# Altium PCB LimeSDR-Micro_mPCIe_1v4.PcbDoc (part 2 of 11)
Units mm, origin at the board's own origin, x right, y up, seen from the top; angles counter-clockwise.
Board outline 50.8 x 29.7 mm, 8 copper layers (Top, L2, L3, L4, L5, L6, L7, Bottom), stack 0.925 mm thick; 664 components, 386 nets, 2358 pads, 843 vias.
Unrouted connection lines stored in the file: 28.
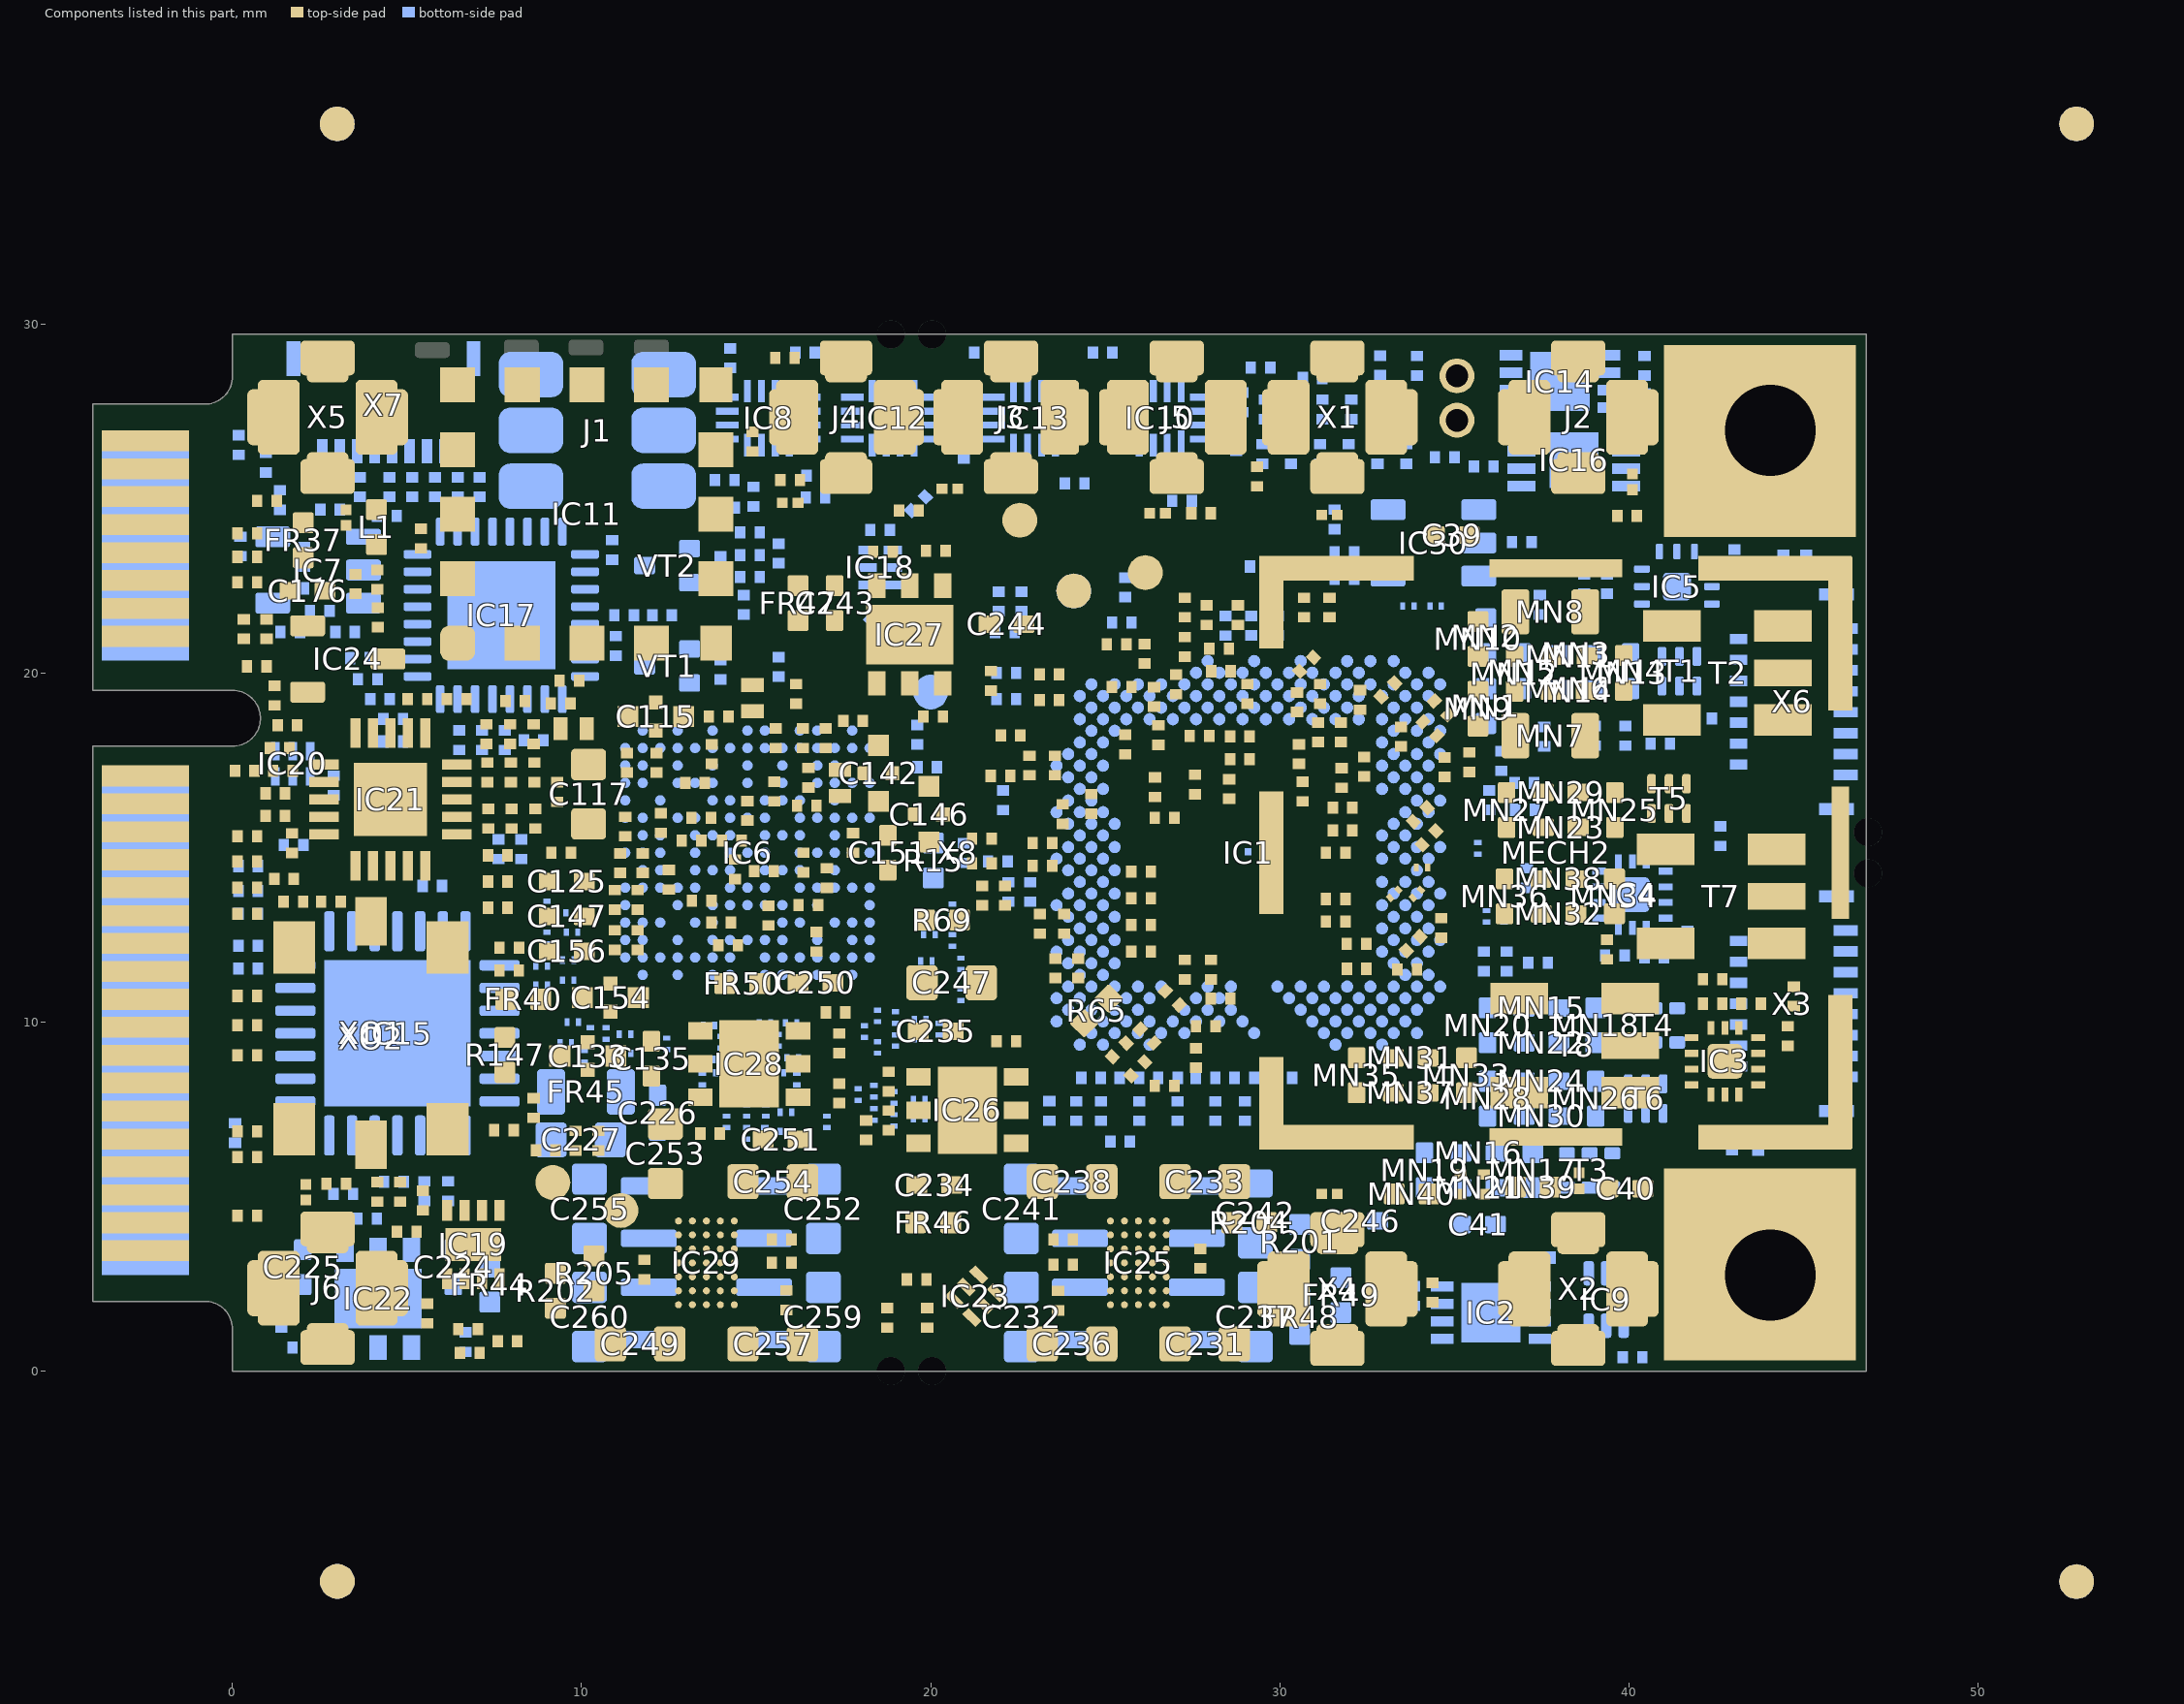
[diagram p8: the components of this part, seen from the top]

## Components (designator, comment, footprint, x,y, rotation, side; value= is the part's Value field where it differs from the comment) (continued)
R185 "3k3, 1%" RES0201 13.974,23.068 r270 bottom
R186 "3k3, 1%" RES0201 11.22,21.65 r180 bottom
R187 "0R" RES0201 3.175,5.075 r180 bottom
R188 "10k, 1%" RES0201 0.075,6.82 r270 bottom
R189 "5.6k, 1%" RES0201 2.624,4.367 r0 bottom
R190 "330R, 1%" RES0201 0.325,21.257 r90 top
R191 "0R" RES0201 0.695,20.187 r0 top
R192 "10k, 1%" RES0201 3.857,4.367 r0 bottom
R193 "0R" RES0201 1.2,19.35 r270 top
R194 "0R" RES0201 18.15,6.9 r90 top
R195 "7.5k, 1%" RES0201 18.8,8.295 r270 top
R196 "10k, 1%" RES0201 18.8,7.185 r270 top
R197 "3k3, 1%" RES0201 23.795,3.775 r0 top
R198 "47k, 1%" RES0201 23.65,2.02 r90 top
R199 "100k, 1%" RES0201 23.795,3.05 r0 top
R200 "0R" RES0201 19.375,24.65 r0 top
R201 "0R" RES0402#2 30.575,3.7 r270 bottom
R202 "0R" RES0402#1 9.25,2.3 r90 top
R203 "0R" RES0201 29.425,23.05 r0 bottom
R204 "0R" RES0402#1 29.125,4.25 r0 top
R205 "0R" RES0402#1 10.35,2.8 r90 top
R206 "0R" RES0201 30.6,23.05 r180 bottom
R207 "12.7k, 1%" RES0201 20.145,23.5 r180 top
R208 "0R" RES0201 1.4,1.525 r270 bottom
R209 "10k, 1%" RES0201 18.635,23.475 r180 top
R210 "0R" RES0201 17.275,10.275 r0 top
R211 "31.6k, 1%" RES0201 17.375,7.955 r90 top
R212 "10k, 1%" RES0201 17.375,9.39 r90 top
R213 "3k3, 1%" RES0201 15.73,3.775 r180 top
R214 "100k, 1%" RES0201 15.73,3.1 r180 top
R215 "3k3, 1%" RES0201 15.863,2.032 r90 top
R216 "3k3, 1%" RES0201 31.85,23.45 r0 bottom
R217 "4.7k, 1%" RES0201 31.85,22.7 r180 bottom
R229 "0R" RES0201 39.95,24.5 r180 top
R230 "0R" RES0201 28.45,21.35 r90 bottom
R231 "0R" RES0201 29.18,21.356 r90 bottom
R232 "0R" RES0201 29.95,21.356 r90 bottom
T1 "3600BL14M050" 3600BL14M050_balun_0603 41.451,20.05 r0 bottom
T2 "TC1-1-13M-45+" TC1-1-13MA+_JA4220-AL_ 42.825,20 r270 top
T3 "B0322J5050AHF" Anaren_0805_balun_B0322J5050AHF 38.875,5.75 r0 bottom
T4 "B0322J5050AHF" Anaren_0805_balun_B0322J5050AHF 40.735,9.905 r0 bottom
T5 "3600BL14M050" 3600BL14M050_balun_0603 41.15,16.4 r0 top
T6 "3600BL14M050" 3600BL14M050_balun_0603 40.483,7.805 r0 bottom
T7 "TC1-1-13M-45+" TC1-1-13MA+_JA4220-AL_ 42.638,13.6 r270 top
T8 "TC1-1-13M-45+" TC1-1-13MA+_JA4220-AL_ 38.45,9.325 r270 top
TP1 "TESTPOINT_PAD" TP_PAD_1MM#1 20,19.45 r180 bottom
TP2 "TESTPOINT_PAD" TP_PAD_1MM#2 26.15,22.875 r90 top
TP3 "TESTPOINT_PAD" TP_PAD_1MM#2 22.55,24.375 r90 top
TP7 "TESTPOINT_PAD" TP_PAD_1MM#2 11.125,4.6 r90 top
TP8 "TESTPOINT_PAD" TP_PAD_1MM#2 9.175,5.4 r90 top
VT1 "DMG1012T" SOT523 12.45,20.2 r180 bottom
VT2 "DMG1012T" SOT523 12.45,23.075 r180 bottom
X1 "U.FL/MMCX" MMCX_UFL_conn_u_v2#5 31.65,27.325 r180 top locked
X2 "U.FL/MMCX" MMCX_UFL_conn_u_v2#1 38.55,2.35 r0 top locked
X3 "5025981593" 5025981593_FPC_CONNECTOR 44.675,10.525 r270 bottom locked
X4 "U.FL/MMCX" MMCX_UFL_conn_u_v2#1 31.65,2.35 r0 top locked
X5 "U.FL/MMCX" MMCX_UFL_conn_u_v2#1 2.725,27.325 r180 top
X6 "5025981593" 5025981593_FPC_connector 44.675,19.175 r270 bottom locked
X7 "8-pin FPC connector" 503480-0800_8PIN_FPC_CONN 4.325,27.675 r0 bottom locked
X8 "mPCI Express Card Edge connector" PCIe_MiniCard -4,18.7 r270 top locked
XO1 "E6245LF 30.72 MHz" RAKON_RPT7050A 3.964,9.685 r90 top locked
XO2 "E5280LF 30.72MHz" RAKON_TXCO 3.964,9.685 r90 top locked

## Footprints (in the part's own frame and the unit in brackets; to place one, negate y for a bottom-side part, rotate by r counter-clockwise, add the part's x,y. Pads: shape width x height; smd on the part's side, far side on the other; paste and mask are expansions set on the pad)
74LVC1G3157FZ4_SPDT_SW_DFN1410-6 [mm]
  rect 0.525x0.25 smd mask+0.05: 1(-0.363,0.5) 2(-0.363,0) 3(-0.363,-0.5) 4(0.363,-0.5) 5(0.363,0) 6(0.363,0.5)
  silkscreen extent -0.82,-0.8 0.5,0.9, body extent -0.51,-0.7 0.51,0.7, height 0.4
3600BL14M050_balun_0603 [mm]
  rrect50% 0.25x0.55 smd mask+0.04: 1(0.5,0.425) 2(0,0.425) 3(-0.5,0.425) 4(-0.5,-0.425) 5(0,-0.425) 6(0.5,-0.425)
  silkscreen extent -0.92,-0.53 0.92,0.53, body extent -0.8,-0.41 0.8,0.41, height 0.6
503480-0800_8PIN_FPC_CONN [mm]
  rect 0.3x0.7 smd mask+0.05: 1(-1.75,1.325) 2(-1.25,1.325) 3(-0.75,1.325) 4(-0.25,1.325) 5(0.25,1.325) 6(0.75,1.325) 7(1.25,1.325) 8(1.75,1.325)
  rect 0.4x1 smd mask+0.05: MECH(-2.58,-1.325) MECH(2.58,-1.325)
  silkscreen extent -3,-1.8 3,2.03, body extent -2.85,-1.93 2.85,1.67, height 1.88
5025981593_FPC_CONNECTOR [mm]
  rect 0.3x0.7 smd mask+0.05: 1(-2.1,-1.532) 3(-1.5,-1.532) 5(-0.9,-1.532) 7(-0.3,-1.532) 9(0.3,-1.532) 11(0.9,-1.532) 13(1.5,-1.532) 15(2.1,-1.532)
  rect 0.3x0.5 smd mask+0.05: 2(-1.8,1.533) 4(-1.2,1.533) 6(-0.6,1.533) 8(0,1.533) 10(0.6,1.533) 12(1.2,1.533) 14(1.8,1.533)
  rect 0.35x1 smd mask+0.05: MP1(-3.075,-1.267) MP2(3.075,-1.267)
  silkscreen extent -3.3,-1.9 3.3,1.78, body extent -3.3,-1.77 3.3,2.03, height 1.16
5025981593_FPC_connector [mm]
  rect 0.3x0.7 smd mask+0.05: 1(-2.1,-1.532) 3(-1.5,-1.532) 5(-0.9,-1.532) 7(-0.3,-1.532) 9(0.3,-1.532) 11(0.9,-1.532) 13(1.5,-1.532) 15(2.1,-1.532)
  rect 0.3x0.5 smd mask+0.05: 2(-1.8,1.533) 4(-1.2,1.533) 6(-0.6,1.533) 8(0,1.533) 10(0.6,1.533) 12(1.2,1.533) 14(1.8,1.533)
  rect 0.35x1 smd mask+0.05: MP1(-3.075,-1.267) MP2(3.075,-1.267)
  silkscreen extent -3.3,-1.9 3.3,1.78, body extent -3.3,-1.77 3.3,2.03, height 1.16
AD5693RACPZ-1RL7_DAC_8LFCSP [mm]
  rect 0.6x0.3 smd mask+0.05: 1(-0.975,0.75) 2(-0.975,0.25) 3(-0.975,-0.25) 4(-0.975,-0.75) 5(0.975,-0.75) 6(0.975,-0.25) 7(0.975,0.25) 8(0.975,0.75)
  rect 0.95x1.6 smd mask+0.05: PAD(0,0)
  silkscreen extent -1.5,-1.1 1.5,1.54, body extent -1.02,-1 1.01,1, height 0.55
ADF4002 [mm]
  rect 0.85x0.3 smd mask+0.05: 1(-1.9,1) 2(-1.9,0.5) 3(-1.9,0) 4(-1.9,-0.5) 5(-1.9,-1) 11(1.9,-1) 12(1.9,-0.5) 13(1.9,0) 14(1.9,0.5) 15(1.9,1)
  rect 0.3x0.85 smd mask+0.05: 6(-1,-1.9) 7(-0.5,-1.9) 8(0,-1.9) 9(0.5,-1.9) 10(1,-1.9) 16(1,1.9) 17(0.5,1.9) 18(0,1.9) 19(-0.5,1.9) 20(-1,1.9)
  rect 2.1x2.1 smd mask+0.05: 21(0,0)
  silkscreen extent -2.3,-2.22 2.3,2.22, body extent -2.02,-2.02 2.02,2.02, height 0.8
Anaren_0805_balun_B0322J5050AHF [mm] "B0430J50100AHF anaren smd 0.4 GHz - 3 GHz balun"
  rrect30% 0.45x0.35 smd mask+0.05: 1(0.65,0.49) 2(0,0.49) 3(-0.65,0.49) 4(-0.65,-0.49) 5(0,-0.49) 6(0.65,-0.49)
  ASM BOT keep-out circle w0.1: c0.65,0.45 r0.035
  silkscreen extent -1.1,-0.4 1.1,0.8, body extent -1.02,-0.65 1.03,0.65, height 0.71
AP7330-W5-7_SOT25 [mm]
  round 0.5 on Mech14: 0(0,0)
  rrect25% 1x0.6 smd: 1(-1.3,0.95) 2(-1.3,0) 3(-1.3,-0.95) 4(1.3,-0.95) 5(1.3,0.95)
  silkscreen extent -1.27,-1.35 0.51,1.7, body extent -1.4,-1.45 1.4,1.45, height 1.19
ATECC508A_UDFN8_v2 [mm]
  rect 0.8x0.3 smd mask+0.05: 1(-1.5,0.75) 2(-1.5,0.25) 3(-1.5,-0.25) 4(-1.5,-0.75) 5(1.5,-0.75) 6(1.5,-0.25) 7(1.5,0.25) 8(1.5,0.75)
  rect 1.4x1.6 smd mask+0.05: PAD(0,0)
  silkscreen extent -1.64,-1.1 1.2,1.24, body extent -1.5,-1 1.5,1, height 0.53
BMI-S-202-C_RF_SHIELD_COVER [mm]
  body extent -8.48,-8.48 8.48,8.48, height 4.03
BMI-S-202-F_RF_SHIELD_FRAME_v3 [mm]
  rect 0.7x2.65 smd mask+0.05: 1(-8.15,-7.175) 1(-8.15,7.175)
  rect 0.7x3.5 smd mask+0.05: 1(-8.15,0)
  rect 4.4x0.7 smd mask+0.05: 1(-6.275,-8.15) 1(-6.275,8.15) 1(6.275,-8.15) 1(6.275,8.15)
  rect 3.8x0.5 smd mask+0.05: 1(0,-8.15) 1(0,8.15)
  rect 0.7x4.4 smd mask+0.05: 1(8.15,-6.275) 1(8.15,6.275)
  rect 0.5x3.8 smd mask+0.05: 1(8.15,0)
  body extent -8.25,-8.25 8.25,8.25, height 3.6
CAP0201 [mm]
  rect 0.3x0.35 smd mask+0.05: 1(-0.28,0) 2(0.28,0)
  silkscreen extent -0.2,-0.33 0.2,0.32, body extent -0.3,-0.15 0.3,0.15, height 0.25
CAP0402#1 [mm] "Chip Capacitor, Body 1.0x0.5mm, 0402, IPC Medium Density"
  round 0.2 on Mech15: 0(0,0)
  rrect20% 0.6x0.5 smd: 1(-0.5,0) 2(0.5,0)
  Top pour cut-out: -0.2,0.35 0.2,0.35 0.2,-0.35 -0.2,-0.35
  silkscreen extent -1.05,-0.5 1.05,0.5, body extent -0.52,-0.27 0.53,0.28, height 0.55
CAP0402#2 [mm] "Chip Capacitor, Body 1.0x0.5mm, 0402, IPC Medium Density"
  round 0.2 on Mech14: 0(0,0)
  rrect20% 0.6x0.5 smd: 1(-0.5,0) 2(0.5,0)
  Top pour cut-out: -0.2,0.35 0.2,0.35 0.2,-0.35 -0.2,-0.35
  silkscreen extent -1.05,-0.5 1.05,0.5, body extent -0.52,-0.27 0.53,0.28, height 0.55
CAP0603#1 [mm] "Chip Capacitor, Body 1.6x0.8mm, 0603, IPC Medium Density"
  round 0.254 on Mech15: 0(0,0)
  rrect25% 0.9x1 smd: 1(-0.85,0) 2(0.85,0)
  Top pour cut-out: -0.4,0.6 0.4,0.6 0.4,-0.6 -0.4,-0.6
  silkscreen extent -0.18,-0.48 0.18,0.48, body extent -0.85,-0.45 0.85,0.45, height 0.89
CAP0603#2 [mm] "Chip Capacitor, Body 1.6x0.8mm, 0603, IPC Medium Density"
  round 0.254 on Mech14: 0(0,0)
  rrect25% 0.9x1 smd: 1(-0.85,0) 2(0.85,0)
  Top pour cut-out: -0.4,0.6 0.4,0.6 0.4,-0.6 -0.4,-0.6
  silkscreen extent -0.18,-0.48 0.18,0.48, body extent -0.85,-0.45 0.85,0.45, height 0.89
CAP0603#3 [mm] "Chip Capacitor, Body 1.6x0.8mm, 0603, IPC Medium Density"
  round 0.254 on Mech14: 0(0,0)
  rrect25% 0.8x1 smd: 1(-0.85,0)
  rrect25% 0.9x1 smd: 2(0.85,0)
  Top pour cut-out: -0.4,0.6 0.4,0.6 0.4,-0.6 -0.4,-0.6
  silkscreen extent -0.18,-0.48 0.18,0.48, body extent -0.85,-0.45 0.85,0.45, height 0.89
CAP0603_FEEDTHROUGH [mm]
  rect 0.6x0.6 smd mask+0.05: 1(-0.8,0) 3(0.8,0)
  rect 0.4x0.4 smd mask+0.05: 2(0,0.4) 2(0,-0.4)
  Top region: 0.375,0.425
  Top region: -0.2,-0.6 -0.2,0.6 0.2,0.6 0.2,-0.6
  Top region: -0.375,-0.4
  silkscreen extent -1.15,-0.65 1.15,0.65, body extent -0.8,-0.4 0.8,0.4, height 0.6
CAP01005 [mm]
  rect 0.15x0.215 smd paste+0 mask+0.03: 1(-0.165,0) 2(0.165,0)
  silkscreen extent -0.13,-0.23 0.13,0.23, body extent -0.2,-0.1 0.2,0.1, height 0.22
ESD8472_X3DFN2 [mm]
  rect 0.31x0.3 smd mask+0.05: 1(-0.225,0) 2(0.225,0)
  silkscreen extent -0.2,-0.33 0.2,0.33, body extent -0.34,-0.17 0.34,0.18, height 0.33
Fiducial [mm]
  round 1 smd paste-1 mask+1: 1(0,0)
  Top pour cut-out: 0,1.5 -0.574,1.386 -1.061,1.061 -1.386,0.574 -1.5,0 -1.5,0 -1.386,-0.574 -1.061,-1.061 -0.574,-1.386 0,-1.5 0,-1.5 0.574,-1.386 1.061,-1.061 1.386,-0.574 1.5,0 1.5,0 1.386,0.574 1.061,1.061 0.574,1.386 0,1.5
Fiducial_local [mm]
  round 1 smd paste-1 mask+0.5: 1(0,0)
  Top pour cut-out: -1.05,0 -0.97,-0.402 -0.742,-0.742 -0.402,-0.97 0,-1.05 0,-1.05 0.402,-0.97 0.742,-0.742 0.97,-0.402 1.05,0 1.05,0 0.97,0.402 0.742,0.742 0.402,0.97 0,1.05 0,1.05 -0.402,0.97 -0.742,0.742 -0.97,0.402 -1.05,0
HEADER_2x1_TH_HALF_PITCH [mm]
  round 1 hole 0.65 mask+0.05: 1(-0.635,0) 2(0.635,0)
  silkscreen extent -1.4,-1.37 1.4,1.37, body extent -1.27,-1.2 1.27,1.2, height 5
IND0806 [mm]
  rrect30% 0.5x1.6 smd mask+0.05: 1(-0.75,0) 2(0.75,0)
  silkscreen extent -1.2,-1 1.2,1, body extent -1,-0.8 1,0.8, height 0.99
LA9310X7S11AA [mm] "BGA, 81-Leads, Body 8,00x8,00mmx0,45mm, Pitch 0,50mm"
  round 0.3 smd mask+0.05: A2(-3,3.5) A4(-2,3.5) A6(-1,3.5) A7(-0.5,3.5) A9(0.5,3.5) A10(1,3.5) A12(2,3.5) A14(3,3.5) B1(-3.5,3) B2(-3,3) B3(-2.5,3) B4(-2,3) B5(-1.5,3) B6(-1,3) B7(-0.5,3) B9(0.5,3) B10(1,3) B11(1.5,3) B12(2,3) B13(2.5,3) B14(3,3) B15(3.5,3) C1(-3.5,2.5) C2(-3,2.5) C4(-2,2.5) C6(-1,2.5) C7(-0.5,2.5) C8(0,2.5) C9(0.5,2.5) C10(1,2.5) C12(2,2.5) C14(3,2.5) C15(3.5,2.5) D1(-3.5,2) D2(-3,2) D3(-2.5,2) D5(-1.5,2) D6(-1,2) D10(1,2) D11(1.5,2) D13(2.5,2) D14(3,2) D15(3.5,2) E1(-3.5,1.5) E4(-2,1.5) E6(-1,1.5) E7(-0.5,1.5) E8(0,1.5) E9(0.5,1.5) E10(1,1.5) E12(2,1.5) E15(3.5,1.5) F1(-3.5,1) F2(-3,1) F3(-2.5,1) F4(-2,1) F5(-1.5,1) F7(-0.5,1) F8(0,1) F9(0.5,1) F11(1.5,1) F12(2,1) F13(2.5,1) F14(3,1) F15(3.5,1) G2(-3,0.5) G3(-2.5,0.5) G5(-1.5,0.5) G6(-1,0.5) G7(-0.5,0.5) G9(0.5,0.5) G10(1,0.5) G11(1.5,0.5) G13(2.5,0.5) H1(-3.5,0) H2(-3,0) H3(-2.5,0) H5(-1.5,0) H7(-0.5,0) H8(0,0) H9(0.5,0) H11(1.5,0) H12(2,0) H13(2.5,0) H14(3,0) H15(3.5,0) J2(-3,-0.5) J3(-2.5,-0.5) J5(-1.5,-0.5) J6(-1,-0.5) J7(-0.5,-0.5) J9(0.5,-0.5) J10(1,-0.5) J11(1.5,-0.5) J13(2.5,-0.5) K1(-3.5,-1) K2(-3,-1) K4(-2,-1) K5(-1.5,-1) K7(-0.5,-1) K8(0,-1) K9(0.5,-1) K11(1.5,-1) K12(2,-1) K13(2.5,-1) K14(3,-1) K15(3.5,-1) L1(-3.5,-1.5) L3(-2.5,-1.5) L6(-1,-1.5) L7(-0.5,-1.5) L9(0.5,-1.5) L10(1,-1.5) L11(1.5,-1.5) L13(2.5,-1.5) M1(-3.5,-2) M2(-3,-2) M4(-2,-2) M5(-1.5,-2) M6(-1,-2) M8(0,-2) M10(1,-2) M12(2,-2) M13(2.5,-2) M14(3,-2) M15(3.5,-2) N1(-3.5,-2.5) N2(-3,-2.5) N4(-2,-2.5) N6(-1,-2.5) N8(0,-2.5) N10(1,-2.5) N12(2,-2.5) N13(2.5,-2.5) P1(-3.5,-3) P2(-3,-3) P3(-2.5,-3) P4(-2,-3) P5(-1.5,-3) P6(-1,-3) P7(-0.5,-3) P8(0,-3) P9(0.5,-3) P10(1,-3) P11(1.5,-3) P12(2,-3) P13(2.5,-3) P14(3,-3) P15(3.5,-3) R2(-3,-3.5) R4(-2,-3.5) R6(-1,-3.5) R8(0,-3.5) R9(0.5,-3.5) R11(1.5,-3.5) R12(2,-3.5) R14(3,-3.5)
  silkscreen extent -4.3,-4.3 4.3,4.3, body extent -4,-4 4,4, height 0.45
LD39100PUR [mm]
  rect 0.5x0.7 smd mask+0.05: 1(-0.95,-1.4) 2(0,-1.4) 3(0.95,-1.4) 4(0.95,1.4) 5(0,1.4) 6(-0.95,1.4)
  rect 2.5x1.7 smd mask+0.05: PAD(0,0)
  silkscreen extent -1.6,-1.6 1.6,1.6, body extent -1.5,-1.55 1.5,1.55, height 0.8
LED0201 [mm]
  rect 0.3x0.35 smd mask+0.05: A(-0.28,0) K(0.28,0)
  silkscreen extent -0.2,-0.33 0.2,0.33, body extent -0.35,-0.5 0.35,0.18, height 0.2
LMK00101_WQFN32 [mm] "QFN, 24-Leads, Body 4,00x4,00mm, Pitch 0,50mm, Thermal Pad 2,55x2,55mm, IPC Medium Density"
  rrect50% 0.8x0.25 smd mask+0.05: 1(-2.4,1.75) 2(-2.4,1.25) 3(-2.4,0.75) 4(-2.4,0.25) 5(-2.4,-0.25) 6(-2.4,-0.75) 7(-2.4,-1.25) 8(-2.4,-1.75) 17(2.4,-1.75) 18(2.4,-1.25) 19(2.4,-0.75) 20(2.4,-0.25) 21(2.4,0.25) 22(2.4,0.75) 23(2.4,1.25) 24(2.4,1.75)
  rect 3.1x3.1 smd mask+0.05: 4(0,0)
  rrect50% 0.25x0.8 smd mask+0.05: 9(-1.75,-2.4) 10(-1.25,-2.4) 11(-0.75,-2.4) 12(-0.25,-2.4) 13(0.25,-2.4) 14(0.75,-2.4) 15(1.25,-2.4) 16(1.75,-2.4) 25(1.75,2.4) 26(1.25,2.4) 27(0.75,2.4) 28(0.25,2.4) 29(-0.25,2.4) 30(-0.75,2.4) 31(-1.25,2.4) 32(-1.75,2.4)
  silkscreen extent -2.8,-2.8 2.8,2.8, body extent -2.52,-2.51 2.5,2.51, height 0.8
LMS7002M_V5_LESS_SILK [mm] "LMS7002 without AM2 pad (internally unconnected)"
  round 0.35 smd mask+0: A5(-3.998,5.49) A7(-3.332,5.49) A9(-2.666,5.49) A13(-1.334,5.49) A17(-0.002,5.49) A21(1.33,5.49) AA1(-5.33,-1.17) AA3(-4.664,-1.17) AA5(-3.998,-1.17) AA29(3.994,-1.17) AA31(4.66,-1.17) AA33(5.326,-1.17) AB2(-4.997,-1.503) AB4(-4.331,-1.503) AB6(-3.665,-1.503) AB30(4.327,-1.503) AB32(4.993,-1.503) AB34(5.659,-1.503) AC3(-4.664,-1.836) AC5(-3.998,-1.836) AC29(3.994,-1.836) AC31(4.66,-1.836) AC33(5.326,-1.836) AD2(-4.997,-2.169) AD4(-4.331,-2.169) AD6(-3.665,-2.169) AD30(4.327,-2.169) AD32(4.993,-2.169) AE1(-5.33,-2.502) AE3(-4.664,-2.502) AE5(-3.998,-2.502) AE29(3.994,-2.502) AE31(4.66,-2.502) AE33(5.326,-2.502) AF2(-4.997,-2.835) AF4(-4.331,-2.835) AF6(-3.665,-2.835) AF30(4.327,-2.835) AF32(4.993,-2.835) AF34(5.659,-2.835) AG3(-4.664,-3.168) AG5(-3.998,-3.168) AG29(3.994,-3.168) AG31(4.66,-3.168) AG33(5.326,-3.168) AH2(-4.997,-3.501) AH4(-4.331,-3.501) AH30(4.327,-3.501) AH32(4.993,-3.501) AJ1(-5.33,-3.834) AJ3(-4.664,-3.834) AJ5(-3.998,-3.834) AJ7(-3.332,-3.834) AJ9(-2.666,-3.834) AJ11(-2,-3.834) AJ13(-1.334,-3.834) AJ15(-0.668,-3.834) AJ19(0.664,-3.834) AJ21(1.33,-3.834) AJ25(2.662,-3.834) AJ27(3.328,-3.834) AJ29(3.994,-3.834) AJ31(4.66,-3.834) AJ33(5.326,-3.834) AK2(-4.997,-4.167) AK4(-4.331,-4.167) AK6(-3.665,-4.167) AK8(-2.999,-4.167) AK10(-2.333,-4.167) AK12(-1.667,-4.167) AK14(-1.001,-4.167) AK20(0.997,-4.167) AK22(1.663,-4.167) AK26(2.995,-4.167) AK28(3.661,-4.167) AK30(4.327,-4.167) AK32(4.993,-4.167) AK34(5.659,-4.167) AL3(-4.664,-4.5) AL5(-3.998,-4.5) AL7(-3.332,-4.5) AL9(-2.666,-4.5) AL11(-2,-4.5) AL13(-1.334,-4.5) AL19(0.664,-4.5) AL21(1.33,-4.5) AL23(1.996,-4.5) AL27(3.328,-4.5) AL29(3.994,-4.5) AL31(4.66,-4.5) AL33(5.326,-4.5) AM4(-4.331,-4.833) AM6(-3.665,-4.833) AM8(-2.999,-4.833) AM10(-2.333,-4.833) AM12(-1.667,-4.833) AM18(0.331,-4.833) AM20(0.997,-4.833) AM22(1.663,-4.833) AM24(2.329,-4.833) AM26(2.995,-4.833) AM28(3.661,-4.833) AM30(4.327,-4.833) AM34(5.659,-4.833) AN3(-4.664,-5.166) AN5(-3.998,-5.166) AN7(-3.332,-5.166) AN9(-2.666,-5.166) AN11(-2,-5.166) AN17(-0.002,-5.166) AN23(1.996,-5.166) AN25(2.662,-5.166) AN27(3.328,-5.166) AN29(3.994,-5.166) AN31(4.66,-5.166) AP6(-3.665,-5.499) AP10(-2.333,-5.499) AP26(2.995,-5.499) AP30(4.327,-5.499) AP32(4.993,-5.499) B2(-4.997,5.157) B4(-4.331,5.157) B8(-2.999,5.157) B10(-2.333,5.157) B12(-1.667,5.157) B14(-1.001,5.157) B16(-0.335,5.157) B18(0.331,5.157) B20(0.997,5.157) B22(1.663,5.157) C1(-5.33,4.824) C3(-4.664,4.824) C5(-3.998,4.824) C7(-3.332,4.824) C9(-2.666,4.824) C11(-2,4.824) C13(-1.334,4.824) C15(-0.668,4.824) C17(-0.002,4.824) C19(0.664,4.824) C21(1.33,4.824) C23(1.996,4.824) C25(2.662,4.824) C27(3.328,4.824) C29(3.994,4.824) C31(4.66,4.824) D2(-4.997,4.491) D4(-4.331,4.491) D6(-3.665,4.491) D8(-2.999,4.491) D10(-2.333,4.491) D12(-1.667,4.491) D14(-1.001,4.491) D16(-0.335,4.491) D18(0.331,4.491) D20(0.997,4.491) D22(1.663,4.491) D24(2.329,4.491) D26(2.995,4.491) D28(3.661,4.491) D30(4.327,4.491) D32(4.993,4.491) E3(-4.664,4.158) E5(-3.998,4.158) E9(-2.666,4.158) E11(-2,4.158) E13(-1.334,4.158) E15(-0.668,4.158) E17(-0.002,4.158) E19(0.664,4.158) E21(1.33,4.158) E23(1.996,4.158) E25(2.662,4.158) E27(3.328,4.158) E29(3.994,4.158) E31(4.66,4.158) F2(-4.997,3.825) F4(-4.331,3.825) F6(-3.665,3.825) F8(-2.999,3.825) F10(-2.333,3.825) F12(-1.667,3.825) F14(-1.001,3.825) F16(-0.335,3.825) F18(0.331,3.825) F20(0.997,3.825) F22(1.663,3.825) F24(2.329,3.825) F26(2.995,3.825) F28(3.661,3.825) F30(4.327,3.825) F32(4.993,3.825) G1(-5.33,3.492) G3(-4.664,3.492) G5(-3.998,3.492) G29(3.994,3.492) G31(4.66,3.492) H2(-4.997,3.159) H6(-3.665,3.159) H30(4.327,3.159) H32(4.993,3.159) J1(-5.33,2.826) J3(-4.664,2.826) J5(-3.998,2.826) J31(4.66,2.826) J33(5.326,2.826) K2(-4.997,2.493) K4(-4.331,2.493) K6(-3.665,2.493) K30(4.327,2.493) K32(4.993,2.493) K34(5.659,2.493) L3(-4.664,2.16) L5(-3.998,2.16) L31(4.66,2.16) L33(5.326,2.16) M2(-4.997,1.827) M4(-4.331,1.827) M6(-3.665,1.827) M30(4.327,1.827) M32(4.993,1.827) N1(-5.33,1.494) N3(-4.664,1.494) N31(4.66,1.494) N33(5.326,1.494) P2(-4.997,1.161) P4(-4.331,1.161) P30(4.327,1.161) P32(4.993,1.161) P34(5.659,1.161) R3(-4.664,0.828) R5(-3.998,0.828) R29(3.994,0.828) R31(4.66,0.828) R33(5.326,0.828) T4(-4.331,0.495) T6(-3.665,0.495) T30(4.327,0.495) T32(4.993,0.495) U1(-5.33,0.162) U3(-4.664,0.162) U5(-3.998,0.162) U29(3.994,0.162) U31(4.66,0.162) U33(5.326,0.162) V2(-4.997,-0.171) V4(-4.331,-0.171) V6(-3.665,-0.171) V30(4.327,-0.171) V32(4.993,-0.171) V34(5.659,-0.171) W3(-4.664,-0.504) W29(3.994,-0.504) W31(4.66,-0.504) W33(5.326,-0.504) Y2(-4.997,-0.837) Y4(-4.331,-0.837) Y6(-3.665,-0.837) Y30(4.327,-0.837) Y32(4.993,-0.837)
  rect 0.2x0.2 smd: GND(0.175,0.025)
  Top region: -3.325,3.5 3.675,3.5 3.675,-3.5 -3.325,-3.5
  silkscreen extent -6.1,-6.3 6.4,6.2, body extent -5.6,-5.75 5.9,5.75, height 0.97
LP8758A1E0YFFR_QUAD_DC-DC_35DSBGA [mm]
  round 0.2 smd paste+0 mask+0.05: A1(-0.8,1.2) A2(-0.4,1.2) A3(0,1.2) A4(0.4,1.2) A5(0.8,1.2) B1(-0.8,0.8) B2(-0.4,0.8) B3(0,0.8) B4(0.4,0.8) B5(0.8,0.8) C1(-0.8,0.4) C2(-0.4,0.4) C3(0,0.4) C4(0.4,0.4) C5(0.8,0.4) D1(-0.8,0) D2(-0.4,0) D3(0,0) D4(0.4,0) D5(0.8,0) E1(-0.8,-0.4) E2(-0.4,-0.4) E3(0,-0.4) E4(0.4,-0.4) E5(0.8,-0.4) F1(-0.8,-0.8) F2(-0.4,-0.8) F3(0,-0.8) F4(0.4,-0.8) F5(0.8,-0.8) G1(-0.8,-1.2) G2(-0.4,-1.2) G3(0,-1.2) G4(0.4,-1.2) G5(0.8,-1.2)
  silkscreen extent -1.55,-1.6 1.22,1.6, body extent -1.07,-1.45 1.07,1.45, height 0.63
M10578-A3_V2 [mm] "RADIONOVA® RF Receiver GPS 1.575GHz -165dBm Module"
  rrect50% 1x1 smd mask+0.05: 1(-3.7,3.7)
  rect 1x1 smd mask+0.05: 2(-1.85,3.7) 3(0,3.7) 4(1.85,3.7) 5(3.7,3.7) 6(3.7,1.85) 7(3.7,0) 8(3.7,-1.85) 10(1.85,-3.7) 11(0,-3.7) 12(-1.85,-3.7) 14(-3.7,-1.85) 15(-3.7,0) 16(-3.7,1.85)
  rect 1x0.95 smd mask+0.05: 9(3.7,-3.7)
  rect 1x0.9 smd mask+0.05: 13(-3.7,-3.7)
  silkscreen extent -5,-5 5,5, body extent -4.5,-4.5 4.5,4.5, height 1.3
M24128-DFMC6TG [mm] "8-UFDFPN (2x3)"
  rect 0.65x0.3 smd mask+0.045: 1(-1.4,0.75) 2(-1.4,0.25) 3(-1.4,-0.25) 4(-1.4,-0.75) 5(1.4,-0.75) 6(1.4,-0.25) 7(1.4,0.25) 8(1.4,0.75)
  rect 1.7x1.7 smd mask+0.05: PAD(0,0)
  silkscreen extent -2.06,-1.1 0.9,1.1, body extent -1.52,-1.01 1.52,0.99, height 0.9
MCP23017-E/ML_QFN28 [mm]
  rrect50% 1.15x0.3 smd mask+0.05: 1(-2.925,1.95) 2(-2.925,1.3) 3(-2.925,0.65) 4(-2.925,0) 5(-2.925,-0.65) 6(-2.925,-1.3) 7(-2.925,-1.95) 15(2.925,-1.95) 16(2.925,-1.3) 17(2.925,-0.65) 18(2.925,0) 19(2.925,0.65) 20(2.925,1.3) 21(2.925,1.95)
  rrect50% 0.3x1.15 smd mask+0.05: 8(-1.95,-2.925) 9(-1.3,-2.925) 10(-0.65,-2.925) 11(0,-2.925) 12(0.65,-2.925) 13(1.3,-2.925) 14(1.95,-2.925) 22(1.95,2.925) 23(1.3,2.925) 24(0.65,2.925) 25(0,2.925) 26(-0.65,2.925) 27(-1.3,2.925) 28(-1.95,2.925)
  rect 4.2x4.2 smd mask+0.05: PAD(0,0)
  silkscreen extent -3.5,-3.5 3.5,3.5, body extent -3.05,-3.05 3.05,3.05, height 1.01
MECH_JUMPER_HALF_PITCH [mm]
  body extent -1.25,-0.57 1.25,0.63, height 7.3
MMCX_UFL_conn_u_v2#1 [mm] "Less silkscreen"
  rrect25% 1.55x1 smd mask+0.05: 1(0,1.7) 2(0,-1.7)
  rrect25% 1.2x1.2 smd mask+0.05: 1(0,1.6) 2(0,-1.6)
  rrect25% 1.2x1.6 smd mask+0.05: 2(-1.7,0) 2(1.7,0)
  rrect25% 1.2x2.15 smd mask+0.05: 2(-1.4,0) 2(1.4,0)
  silkscreen extent -2.3,-2.2 2.3,-1.1, body extent -1.5,-1.55 1.5,1.55, height 1.25
MMCX_UFL_conn_u_v2#2 [mm] "Less silkscreen"
  rrect25% 1.2x1.2 smd mask+0.05: 1(0,1.6) 2(0,-1.6)
  rrect25% 1.55x1 smd mask+0.05: 1(0,1.7) 2(0,-1.7)
  rrect25% 1.05x1.6 smd mask+0.05: 2(-1.7,0) 2(1.7,0)
  rrect25% 1.1x2.15 smd mask+0.05: 2(-1.4,0)
  rrect25% 1.2x2.15 smd mask+0.05: 2(1.4,0)
  silkscreen extent -2.3,-2.2 2.3,-1.1, body extent -1.5,-1.55 1.5,1.55, height 1.25
MMCX_UFL_conn_u_v2#3 [mm] "Less silkscreen"
  rrect25% 1.5x1 smd mask+0.05: 1(0,1.7) 2(0,-1.7)
  rrect25% 1.2x1.2 smd mask+0.05: 1(0,1.6) 2(0,-1.6)
  rrect25% 1.05x1.6 smd mask+0.05: 2(-1.7,0)
  rrect25% 1.2x2.15 smd mask+0.05: 2(-1.4,0) 2(1.4,0)
  rrect25% 1x1.6 smd mask+0.05: 2(1.7,0)
  silkscreen extent -2.3,-2.2 2.3,-1.1, body extent -1.5,-1.55 1.5,1.55, height 1.25
MMCX_UFL_conn_u_v2#4 [mm] "Less silkscreen"
  rrect25% 1.55x1 smd mask+0.05: 1(0,1.7) 2(0,-1.7)
  rrect25% 1.2x1.2 smd mask+0.05: 1(0,1.6) 2(0,-1.6)
  rrect25% 0.6x1.6 smd mask+0.05: 2(-1.7,0)
  rrect25% 1.2x2.15 smd mask+0.05: 2(-1.4,0) 2(1.4,0)
  rrect25% 1.05x1.6 smd mask+0.05: 2(1.7,0)
  silkscreen extent -2.3,-2.2 2.3,-1.1, body extent -1.5,-1.55 1.5,1.55, height 1.25
MMCX_UFL_conn_u_v2#5 [mm] "Less silkscreen"
  rrect25% 1.55x1 smd mask+0.05: 1(0,1.7) 2(0,-1.7)
  rrect25% 1.2x1.2 smd mask+0.05: 1(0,1.6) 2(0,-1.6)
  rrect25% 1.2x1.6 smd mask+0.05: 2(-1.7,0)
  rrect25% 1.2x2.15 smd mask+0.05: 2(-1.4,0) 2(1.4,0)
  rrect25% 0.9x1.6 smd mask+0.05: 2(1.7,0)
  silkscreen extent -2.3,-2.2 2.3,-1.1, body extent -1.5,-1.55 1.5,1.55, height 1.25
MOLEX_0788641001_SPRING_CONTACTS [mm]
  rrect50% 1.3x1.85 smd paste-5: 1(-1.6,1.9) 2(0,1.9) 3(1.6,1.9) 4(1.6,-1.9) 5(0,-1.9) 6(-1.6,-1.9)
  silkscreen extent -2.5,-3.1 2.5,3.1, body extent -2.4,-2.48 2.4,2.52, height 2
PCIe_MiniCard [mm]
  rect 5.5x5.5 hole 2.6 copper offset 0.3,-0.3 paste-2 mask+0: 0(-8.25,48.05)
  rect 5.5x5.5 hole 2.6 copper offset -0.3,-0.3 paste-2 mask+0: 0(15.95,48.05)
  rect 0.6x2.5 smd paste-2: 1(-7.95,1.5) 3(-7.15,1.5) 5(-6.35,1.5) 7(-5.55,1.5) 9(-4.75,1.5) 11(-3.95,1.5) 13(-3.15,1.5) 15(-2.35,1.5) 17(1.65,1.5) 19(2.45,1.5) 21(3.25,1.5) 23(4.05,1.5) 25(4.85,1.5) 27(5.65,1.5) 29(6.45,1.5) 31(7.25,1.5) 33(8.05,1.5) 35(8.85,1.5) 37(9.65,1.5) 39(10.45,1.5) 41(11.25,1.5) 43(12.05,1.5) 45(12.85,1.5) 47(13.65,1.5) 49(14.45,1.5) 51(15.25,1.5)
  rect 0.6x2.5 smd far side paste-2: 2(-7.55,1.5) 4(-6.75,1.5) 6(-5.95,1.5) 8(-5.15,1.5) 10(-4.35,1.5) 12(-3.55,1.5) 14(-2.75,1.5) 16(-1.95,1.5) 18(2.05,1.5) 20(2.85,1.5) 22(3.65,1.5) 24(4.45,1.5) 26(5.25,1.5) 28(6.05,1.5) 30(6.85,1.5) 32(7.65,1.5) 34(8.45,1.5) 36(9.25,1.5) 38(10.05,1.5) 40(10.85,1.5) 42(11.65,1.5) 44(12.45,1.5) 46(13.25,1.5) 48(14.05,1.5) 50(14.85,1.5) 52(15.65,1.5)
RAKON_RPT7050A [mm] "Rakon's Pluto+ ASIC"
  rect 1.5x1.2 smd: 1(2.45,2.2) 2(-2.75,2.2) 4(-2.75,-2.2) 5(2.45,-2.2)
  rect 1.4x0.9 smd: 3(-3.2,0) 6(3.2,0)
  body extent -3.5,-2.3 4.25,2.3, height 1.8
RAKON_TXCO [mm] "30.72 MHz or 61.44 MHz"
  rect 1.5x1.2 smd: 1(2.45,2.2) 2(-2.75,2.2) 3(-2.75,-2.2) 4(2.45,-2.2)
  body extent -3.5,-2.3 3.2,2.3, height 2.4
RB521S-30L2-TP_DFN1006 [mm]
  rect 0.4x0.65 smd mask+0.05: A(-0.375,0) C(0.375,0)
  silkscreen extent -0.2,-0.45 0.2,0.45, body extent -0.5,-0.3 0.5,0.3, height 0.48
RES0201 [mm]
  rect 0.3x0.35 smd mask+0.05: 1(-0.28,0) 2(0.28,0)
  silkscreen extent -0.2,-0.33 0.2,0.33, body extent -0.3,-0.15 0.3,0.15, height 0.25
RES0402#1 [mm] "Chip Resistor, Body 1.0x0.5mm, EIA 0402, IPC Medium Density"
  round 0.2 on Mech15: 0(0,0)
  rrect20% 0.6x0.6 smd: 1(-0.5,0) 2(0.5,0)
  Top pour cut-out: -0.2,0.35 0.2,0.35 0.2,-0.35 -0.2,-0.35
  silkscreen extent -1.05,-0.55 1.05,0.55, body extent -0.52,-0.27 0.53,0.28, height 0.4
RES0402#2 [mm] "Chip Resistor, Body 1.0x0.5mm, EIA 0402, IPC Medium Density"
  round 0.2 on Mech14: 0(0,0)
  rrect20% 0.6x0.6 smd: 1(-0.5,0) 2(0.5,0)
  Top pour cut-out: -0.2,0.35 0.2,0.35 0.2,-0.35 -0.2,-0.35
  silkscreen extent -1.05,-0.55 1.05,0.55, body extent -0.52,-0.27 0.53,0.28, height 0.4
RES0805#1 [mm] "Chip Resistor, Body 2.0x1.2mm, 0805, IPC Medium Density"
  round 0.254 on Mech14: 0(0,0)
  rrect25% 0.8x1.3 smd: 1(-1,0) 2(1,0)
  Top pour cut-out: -0.6,0.75 0.6,0.75 0.6,-0.75 -0.6,-0.75
  silkscreen extent -0.38,-0.64 0.38,0.64, body extent -1.1,-0.67 1.1,0.68, height 0.69
RES0805#2 [mm] "Chip Resistor, Body 2.0x1.2mm, 0805, IPC Medium Density"
  round 0.254 on Mech15: 0(0,0)
  rrect25% 0.8x1.3 smd: 1(-1,0) 2(1,0)
  Top pour cut-out: -0.6,0.75 0.6,0.75 0.6,-0.75 -0.6,-0.75
  silkscreen extent -0.38,-0.64 0.38,0.64, body extent -1.1,-0.67 1.1,0.68, height 0.69
RES01005 [mm]
  rect 0.15x0.215 smd paste+0 mask+0.03: 1(-0.165,0) 2(0.165,0)
  silkscreen extent -0.13,-0.23 0.13,0.23, body extent -0.2,-0.1 0.2,0.1, height 0.14
SKY13330-397LF_RF_SW_QFN12 [mm]
  rrect30% 0.45x0.2 smd mask+0.05: 1(-1,0.5) 2(-1,0) 3(-1,-0.5) 7(1,-0.5) 8(1,0) 9(1,0.5)
  rrect30% 0.2x0.45 smd mask+0.05: 4(-0.5,-1) 5(0,-1) 6(0.5,-1) 10(0.5,1) 11(0,1) 12(-0.5,1)
  rrect30% 0.8x0.8 smd mask+0.05: EP(0,0)
  silkscreen extent -1.2,-1.2 1.2,1.2, body extent -1,-1 1,1, height 0.56
SKY13414-485LF_RF_SW_QFN14 [mm]
  rect 0.395x0.2 smd paste+0 mask+0.05: 1(-0.953,0.675) 2(-0.953,0.225) 3(-0.953,-0.225) 4(-0.953,-0.675) 8(0.953,-0.675) 9(0.953,-0.225) 10(0.953,0.225) 11(0.953,0.675)
  rect 0.2x0.395 smd paste+0 mask+0.05: 5(-0.4,-0.953) 6(0,-0.953) 7(0.4,-0.953) 12(0.4,0.953) 13(0,0.953) 14(-0.4,0.953)
  rrect30% 1x1 smd paste+0 mask+0.05: EP(0,0)
  silkscreen extent -1.24,-1.25 1.24,1.25, body extent -1.25,-1.25 1.25,1.25, height 0.25
SN74AVC4T774_v1 [mm] "PQFN, 16-Leads, Body 2,60x1,80mm, Pitch 0,40mm, IPC Medium Density"
  rect 0.2x0.75 smd mask+0.05: 1(-0.6,-0.725)
  rect 0.2x0.65 smd mask+0.05: 2(-0.2,-0.775) 3(0.2,-0.775) 4(0.6,-0.775) 9(0.6,0.775) 10(0.2,0.775) 11(-0.2,0.775) 12(-0.6,0.775)
  rect 0.65x0.2 smd mask+0.05: 5(1.175,-0.6) 6(1.175,-0.2) 7(1.175,0.2) 8(1.175,0.6) 13(-1.175,0.6) 14(-1.175,0.2) 15(-1.175,-0.2) 16(-1.175,-0.6)
  silkscreen extent -1.53,-1.2 1.53,1.2, body extent -1.33,-0.93 1.32,0.92, height 0.55
SOT23-3_v3 [mm] "SOT23, 3 pin"
  round 0.5 on Mech15: 0(0,0)
  rrect25% 1x0.6 smd: 1(-1.15,0.95) 2(-1.15,-0.95) 3(1.15,0)
  silkscreen extent -1.5,-1.45 0.38,1.45, body extent -1.4,-1.45 1.4,1.45, height 1.29
SOT23-5_NO_SILK [mm]
  round 0.5 on Mech14: 0(0,0)
  rrect25% 1x0.45 smd mask+0.03: 1(-1.3,0.95)
  rrect25% 1x0.6 smd: 2(-1.3,0) 3(-1.3,-0.95) 4(1.3,-0.95) 5(1.3,0.95)
  silkscreen extent -1.35,1.52 -1.24,1.64, body extent -1.4,-1.45 1.4,1.45, height 1.44
SOT523 [mm]
  rrect25% 0.6x0.5 smd: D(0.645,0) G(-0.645,0.49) S(-0.645,-0.49)
  silkscreen extent -1.2,-1 1.2,1.5, body extent -0.8,-0.8 0.8,0.8, height 0.8
TC1-1-13MA+_JA4220-AL_ [mm] "Balun compatible with TC1-1-13MA+ and JA4220-AL_"
  rect 0.9x1.65 smd: 1(-1.345,1.59) 3(1.345,1.59) 4(1.345,-1.59) 6(-1.345,-1.59)
  rect 0.76x1.65 smd: 2(0,1.59)
  silkscreen extent -2,-0.6 2,0.7, body extent -1.27,-1.61 1.28,1.61, height 2.8
TMP1075NDRLR_TEMPERATURE_SENSOR_SOT563 [mm]
  rrect50% 0.7x0.3 smd mask+0.05: 1(-0.75,0.5) 2(-0.75,0) 3(-0.75,-0.5) 4(0.75,-0.5) 5(0.75,0) 6(0.75,0.5)
  silkscreen extent -1.3,-1 1.3,1, body extent -0.81,-0.8 0.81,0.8, height 0.58
TP_PAD_1MM#1 [mm]
  round 1 smd paste-1 mask+0.05: 1(0,0)
  silkscreen extent -0.65,-0.65 0.65,0.65
TP_PAD_1MM#2 [mm]
  round 1 smd paste-2 mask+0.05: 1(0,0)
  silkscreen extent -0.65,-0.65 0.65,0.65

## Part data
C1 C2 C3 C4 C5 C6 C9 C11 C14 C16 C19 C21 C24 C26: library part Cap_0402, Manufacturer=Murata, Manufacturer Part Number 1=GRM0225C1E4R7BA03L, Supplier Part Number 1=490-13585-1-ND, ComponentLink1Description=https://search.murata.co.jp/Ceramy/image/img/A01X/G101/ENG/GRM0225C1E4R7BA03-01.pdf?src-supplier=Digi-Key, ComponentLink1URL=https://search.murata.co.jp/Ceramy/image/img/A01X/G101/ENG/GRM0225C1E4R7BA03-01.pdf?src-supplier=Digi-Key, ComponentLink2Description=http://search.murata.co.jp/Ceramy/image/img/A01X/partnumbering_e_01.pdf?src-supplier=Digi-Key, ComponentLink2URL=http://search.murata.co.jp/Ceramy/image/img/A01X/partnumbering_e_01.pdf?src-supplier=Digi-Key, Part Description="CAP CER 4.7PF 25V C0G/NP0 01005", Pricing 1="1=0,1, 10=0,046, 50=0,0266, 100=0,0206, 500=0,0155, 1000=0,01218, 2500=0,01107, 5000=0,01019 (USD)", RoHS=Yes, Stock 1=72879, Supplier 1=Digi-Key
C7 C167 C168 C169 C174 C220 C221 C222 C223: library part Cap_0402, Capacitance=22pF, Case/Package=0201, Case Code (Metric)=0603, Dielectric=C0G, Manufacturer=Murata, Manufacturer Part Number 1=GRM0335C1H220JA01D, Max Operating Temperature=125°C, Min Operating Temperature=-55°C, Package Quantity=15000, Supplier Part Number 1=490-6123-1-ND, Tolerance=5%, Voltage=50V, Case Code (Imperial)=0201, ComponentLink1Description=https://datasheet.ciiva.com/6271/partnumbering-e-01-6271146.pdf?src-supplier=Digi-Key, ComponentLink1URL=https://datasheet.ciiva.com/6271/partnumbering-e-01-6271146.pdf?src-supplier=Digi-Key, ComponentLink2Description=https://datasheet.ciiva.com/6271/partnumbering-e-01-6271143.pdf?src-supplier=Digi-Key, ComponentLink2URL=https://datasheet.ciiva.com/6271/partnumbering-e-01-6271143.pdf?src-supplier=Digi-Key, ComponentLink3Description=https://datasheet.ciiva.com/6271/partnumbering-e-01-6271149.pdf?src-supplier=Digi-Key, ComponentLink3URL=https://datasheet.ciiva.com/6271/partnumbering-e-01-6271149.pdf?src-supplier=Digi-Key, Depth=0.3mm, Height=0.3mm, Lead Free="Lead Free", Length=0.6mm, Mount="Surface Mount", Packaging="Tape and Reel", Part Description="22 pF ±5% 50V Ceramic Capacitor C0G, NP0 0201 (0603 Metric)", Pricing 1="1=0,10000, 10=0,01300, 50=0,00720, 100=0,00590, 500=0,00424, 1000=0,00333, 2500=0,00303, 5000=0,00279 (USD)", RoHS=Yes, RoHS Compliant=Yes, Series=GRM, Stock 1=2966748, Supplier 1=Digi-Key, Termination=SMD/SMT, Thickness=0.013inch, Voltage Rating=50V, Voltage Rating (DC)=50V, Width=0.012inch
C10 C15 C20 C25: library part Cap_0402, Capacitance=22pF, Dielectric=C0G, Manufacturer=Murata, Manufacturer Part Number 1=GRM0225C1H220JA02L, Supplier Part Number 1=490-GRM0225C1H220JA02LCT-ND, Tolerance=5%, Voltage Rating (DC)=50V, Length=400um, Part Description="22pF ±5% 50V C0G, NP0 Ceramic Capacitor -55°C ~ 125°C Surface Mount, MLCC 0402 (1005 Metric) 0.039\" L x 0.020\" W (1.00mm x 0.50mm)", Pricing 1="1=0,1, 10=0,028, 50=0,016, 100=0,0125, 500=0,00938, 1000=0,00736, 2500=0,0067, 5000=0,00616 (USD)", RoHS=Yes, RoHS Compliant=Yes, Stock 1=33525, Supplier 1=Digi-Key, Thickness=200um, Width=200um
C28 C50 C52 C53 C54 C55 C56 C57 C59 C61 C63 C64 C65 C66 C68 C69 C70 C71 C72 C73 C74 C75 C76 C77 C78 C79 C80 C82 C83 C84 C85 C86 C87 C89 C91 C93 C95 C97 C98 C99 C100 C101 C102 C103 C104 C105 C106 C107 C108 C109 C113 C126 C148 C181 C187 C195 C198 C248 C261 C262: library part Cap_0402, Capacitance=1.0µF, Manufacturer="TDK Corporation", Manufacturer Part Number 1=JMK063ABJ105MP-F, Operating Temperature="-55°C ~ 85°C", Package / Case="0201 (0603 Metric)", Ratings=-, Supplier Part Number 1=587-5864-2-ND, Temperature Coefficient=X5R, Tolerance=±20%, Voltage - Rated=6.3V, Applications="General Purpose", Category=Capacitors, Features=-, Height - Seated (Max)=-, Lead Spacing=-, Lead Style=-, Mounting Type="Surface Mount, MLCC", Packaging="Cut Tape (CT)", Part Description="1µF ±20% 6.3V X5R Ceramic Capacitor -55°C ~ 85°C Surface Mount, MLCC 0201 (0603 Metric) 0.024\" L x 0.012\" W (0.60mm x 0.30mm)", RoHS="RoHS Compliant", Size / Dimension="0.024\" L x 0.012\" W (0.60mm x 0.30mm)", Supplier 1=Digi-Key, Thickness (Max)=-
C29 C30 C33 C34 C131 C175 C182 C188 C189 C196 C197 C199 C200 C207 C208 C209 C211 C212 C213 C214 C215 C219 C230 C239 C245 C256: library part Cap_0402, Capacitance=100pF, Case/Package=0201, Case Code (Metric)=0603, Dielectric=C0G, Dielectric Material=Ceramic, Insulation Resistance=10GR, Manufacturer=TDK, Manufacturer Part Number 1=C0603C0G1H101J030BA, Max Operating Temperature=125°C, Min Operating Temperature=-55°C, Package Quantity=1, Supplier Part Number 1=445-1786-1-ND, Tolerance=5%, Voltage=50V, Case Code (Imperial)=0201, ComponentLink1Description=https://datasheet.ciiva.com/24217/c0603c0g1h101j030ba-264106-24217425.pdf?src-supplier=Mouser, ComponentLink1URL=https://datasheet.ciiva.com/24217/c0603c0g1h101j030ba-264106-24217425.pdf?src-supplier=Mouser, ComponentLink2Description=https://datasheet.ciiva.com/16205/mlcc-commercial-general-en-16205590.pdf?src-supplier=Future+Electronics, ComponentLink2URL=https://datasheet.ciiva.com/16205/mlcc-commercial-general-en-16205590.pdf?src-supplier=Future+Electronics, ComponentLink3Description=https://datasheet.ciiva.com/6250/tdkmlcccaprange-6250351.pdf?src-supplier=Digi-Key, ComponentLink3URL=https://datasheet.ciiva.com/6250/tdkmlcccaprange-6250351.pdf?src-supplier=Digi-Key, Construction=Flat, Depth=0.3mm, Height=0.3mm, Lead Free="Lead Free", Length=0.6mm, Mount="Surface Mount", Number of Pins=2, Packaging="Tape and Reel", Part Description="100 pF ±5% 50V Ceramic Capacitor C0G, NP0 0201 (0603 Metric)", Pricing 1="1=0,10000, 10=0,06000, 50=0,03280, 100=0,02670, 500=0,01908, 1000=0,01500, 2500=0,01364, 5000=0,01254 (USD)", Reach SVHC Compliant=Yes, RoHS=Yes, RoHS Compliant=Yes, Series=C, Stock 1=367528, Supplier 1=Digi-Key, Termination=SMD/SMT, Thickness=0.013inch, Voltage Rating=50V, Voltage Rating (DC)=50V, Weight=6E-06oz, Width=0.012inch
C31 C32 C35 C36 C43 C48 C49 C124 C130 C132 C149 C161 C162 C163 C164 C166 C170 C171 C172 C173 C177 C178 C179 C180 C183 C184 C185 C186 C190 C191 C192 C193 C194 C201 C202 C204 C205 C210 C216 C228 C229 C240 C258: library part Cap_0402, Capacitance=100nF, Case/Package=0201, Case Code (Metric)=0603, Manufacturer=Samsung, Manufacturer Part Number 1=CL03A104MP3NNNC, Max Operating Temperature=85°C, Min Operating Temperature=-55°C, Package Quantity=1, Supplier Part Number 1=1276-1321-1-ND, Tolerance=20%, Voltage Rating=10V, Case Code (Imperial)=0201, ComponentLink5Description=https://datasheet.ciiva.com/25788/cl03a104mp3nnnc-25788272.pdf?src-supplier=Digi-Key, ComponentLink5URL=https://datasheet.ciiva.com/25788/cl03a104mp3nnnc-25788272.pdf?src-supplier=Digi-Key, Length=0.024inch, Mount="Surface Mount", Packaging="Tape and Reel", Part Description="0.1 µF ±20% 10V Ceramic Capacitor X5R 0201 (0603 Metric)", Pricing 1="1=0,10000, 10=0,03000, 50=0,01640, 100=0,01330, 500=0,00950, 1000=0,00747, 2500=0,00679, 5000=0,00625 (USD)", RoHS=Yes, RoHS Compliant=Yes, Series=CL, Stock 1=3817176, Supplier 1=Digi-Key, Thickness=0.013inch, Voltage Rating (DC)=10V, Width=0.012inch
C37 C38 C42 C44 C45 C46 C47 C51 C58 C60 C62 C67 C81 C88 C90 C92 C94 C96 C165 C203 C206 C217 C218: library part Cap_0402, Capacitance=1000pF, Manufacturer="TDK Corporation", Manufacturer Part Number 1=C0603X7R1E102K030BA, Operating Temperature="-55°C ~ 125°C", Package / Case="0201 (0603 Metric)", Ratings=-, Supplier Part Number 1=445-7275-1-ND, Temperature Coefficient=X7R, Tolerance=±10%, Voltage - Rated=25V, Applications="General Purpose", Category=Capacitors, Features=-, Height - Seated (Max)=-, Lead Spacing=-, Lead Style=-, Mounting Type="Surface Mount, MLCC", Packaging="Cut Tape (CT)", Part Description="1000pF ±10% 25V X7R Ceramic Capacitor -55°C ~ 125°C Surface Mount, MLCC 0201 (0603 Metric) 0.024\" L x 0.012\" W (0.60mm x 0.30mm)", RoHS="RoHS Compliant", Size / Dimension="0.024\" L x 0.012\" W (0.60mm x 0.30mm)", Supplier 1=Digi-Key, Thickness (Max)="0.013\" (0.33mm)"
C39 C40 C41: library part Cap_0402, Capacitance=510pF, Manufacturer="Murata Electronics North America", Manufacturer Part Number 1=GRM1555C1H511JA01D, Operating Temperature="-55°C ~ 125°C", Package / Case="0402 (1005 Metric)", Ratings=-, Supplier Part Number 1=490-3237-1-ND, Temperature Coefficient="C0G, NP0", Tolerance=±5%, Voltage - Rated=50V, Applications="General Purpose", Category=Capacitors, Features=-, Height - Seated (Max)=-, Lead Spacing=-, Lead Style=-, Mounting Type="Surface Mount, MLCC", Packaging="Cut Tape (CT)", Part Description="510pF ±5% 50V C0G, NP0 Ceramic Capacitor -55°C ~ 125°C Surface Mount, MLCC 0402 (1005 Metric) 0.039\" L x 0.020\" W (1.00mm x 0.50mm)", RoHS="RoHS Compliant", Size / Dimension="0.039\" L x 0.020\" W (1.00mm x 0.50mm)", Supplier 1=Digi-Key, Thickness (Max)="0.022\" (0.55mm)"
C110 C111 C112 C114 C116 C123 C127: library part Cap_0402, Capacitance=220nF, Case/Package=0201, Case Code (Metric)=0603, Dielectric=X5R, Manufacturer=Murata, Manufacturer Part Number 1=GRM033R61A224ME90D, Max Operating Temperature=85°C, Min Operating Temperature=-55°C, Package Quantity=15000, Supplier Part Number 1=490-9984-1-ND, Tolerance=20%, Voltage=10V, Case Code (Imperial)=0201, ComponentLink1Description=http://www.mouser.com/ds/2/281/c02e-2905.pdf?src-supplier=Mouser, ComponentLink1URL=http://www.mouser.com/ds/2/281/c02e-2905.pdf?src-supplier=Mouser, ComponentLink2Description=https://datasheet.octopart.com/GRM033R61A224ME90D-Murata-datasheet-22122223.pdf?src-supplier=Future+Electronics, ComponentLink2URL=https://datasheet.octopart.com/GRM033R61A224ME90D-Murata-datasheet-22122223.pdf?src-supplier=Future+Electronics, ComponentLink3Description=http://search.murata.co.jp/Ceramy/image/img/A01X/G101/ENG/GRM033R61A224ME90-01.pdf?src-supplier=Digi-Key, ComponentLink3URL=http://search.murata.co.jp/Ceramy/image/img/A01X/G101/ENG/GRM033R61A224ME90-01.pdf?src-supplier=Digi-Key, ComponentLink4Description=https://datasheet.octopart.com/GRM033R61A224ME90D-Murata-datasheet-165579666.pdf?src-supplier=TME, ComponentLink4URL=https://datasheet.octopart.com/GRM033R61A224ME90D-Murata-datasheet-165579666.pdf?src-supplier=TME, ComponentLink5Description=https://datasheet.ciiva.com/25788/cl03a104mp3nnnc-25788272.pdf?src-supplier=Digi-Key, ComponentLink5URL=https://datasheet.ciiva.com/25788/cl03a104mp3nnnc-25788272.pdf?src-supplier=Digi-Key, Depth=0.3mm, Height=0.3mm, Lead Free="Lead Free", Length=0.6mm, Material=4241ConductorMaterial, Mount="Surface Mount", Packaging="Tape and Reel", Part Description="0.22 µF ±20% 10V Ceramic Capacitor X5R 0201 (0603 Metric)", Pricing 1="1=0,1, 10=0,026, 50=0,0148, 100=0,0115, 500=0,00866, 1000=0,0068, 2500=0,00618, 5000=0,00569 (USD)", RoHS=Yes, RoHS Compliant=Yes, Series=GRM, Stock 1=689026, Supplier 1=Digi-Key, Termination=SMD/SMT, Thickness=0.013inch, Voltage Rating=10V, Voltage Rating (DC)=10V, Weight=1.2E-05oz, Width=0.012inch
C115 C133 C142 C146 C154: library part Cap_feed_through, Manufacturer=TDK, Manufacturer Part Number 1=YFF18PH0J105MT000N, Supplier Part Number 1=445-3029-1-ND, ComponentLink1Description=http://www.farnell.com/datasheets/2211503.pdf?src-supplier=Farnell, ComponentLink1URL=http://www.farnell.com/datasheets/2211503.pdf?src-supplier=Farnell, ComponentLink2Description=https://product.tdk.com/info/en/catalog/datasheets/3tf_commercial_power_yff-p_en.pdf?ref_disty=digikey&src-supplier=Digi-Key, ComponentLink2URL=https://product.tdk.com/info/en/catalog/datasheets/3tf_commercial_power_yff-p_en.pdf?ref_disty=digikey&src-supplier=Digi-Key, Part Description="1 µF Feed Through Capacitor 6.3V 4 A 12mOhm 0603 (1608 Metric), 4 PC Pad", Pricing 1="1=0,49, 10=0,326, 50=0,2404, 100=0,1957, 500=0,15448, 1000=0,13045 (USD)", RoHS=Yes, Stock 1=22167, Supplier 1=Digi-Key
C117 C232 C237 C241 C242 C252 C255 C259 C260: library part Cap_0603, Capacitance=47uF, Case/Package=0603, Case Code (Metric)=1608, Dielectric=X5R, Manufacturer=Murata, Manufacturer Part Number 1=GRM188R60J476ME15D, Max Operating Temperature=85°C, Min Operating Temperature=-55°C, Supplier Part Number 1=490-13247-1-ND, Tolerance=20%, Voltage Rating=6.3V, Case Code (Imperial)=0603, ComponentLink1Description=http://search.murata.co.jp/Ceramy/image/img/A01X/G101/ENG/GRM188R60J476ME15-01.pdf?src-supplier=Digi-Key, ComponentLink1URL=http://search.murata.co.jp/Ceramy/image/img/A01X/G101/ENG/GRM188R60J476ME15-01.pdf?src-supplier=Digi-Key, ComponentLink2Description=https://www.murata.com/~/media/webrenewal/support/library/catalog/products/capacitor/mlcc/c02e.ashx?la=en-us&src-supplier=Digi-Key, ComponentLink2URL=https://www.murata.com/~/media/webrenewal/support/library/catalog/products/capacitor/mlcc/c02e.ashx?la=en-us&src-supplier=Digi-Key, Length=0.063inch, Mount="Surface Mount", Packaging="Tape and Reel", Part Description="47 µF ±20% 6.3V Ceramic Capacitor X5R 0603 (1608 Metric)", Pricing 1="1=0,45000, 10=0,31900, 50=0,24120, 100=0,21000, 500=0,15556, 1000=0,13223 (USD)", RoHS=Yes, RoHS Compliant=Yes, Stock 1=731453, Supplier 1=Digi-Key, Thickness=0.039inch, Voltage Rating (DC)=6.3V, Width=0.031inch
C118 C120 C121 C128 C129 C136 C137 C138 C139 C140 C141 C144 C145 C152 C153 C157 C158 C159 C160: library part Cap_0402, Capacitance=4.7uF, Case/Package=344Case, Dielectric=1537DielectricType, Manufacturer=Murata, Manufacturer Part Number 1=GRM035R60J475ME15J, Max Operating Temperature=85°C, Min Operating Temperature=-55°C, Supplier Part Number 1=490-GRM035R60J475ME15JCT-ND, Tolerance=20%, Voltage Rating=6.3V, ComponentLink1Description=https://datasheet.octopart.com/GRM035R60J475ME15J-Murata-datasheet-165579666.pdf?src-supplier=TME, ComponentLink1URL=https://datasheet.octopart.com/GRM035R60J475ME15J-Murata-datasheet-165579666.pdf?src-supplier=TME, Height=550um, Length=600um, Material=4241ConductorMaterial, Part Description="4.7 µF ±20% 6.3V Ceramic Capacitor X5R 0201 (0603 Metric)", Pricing 1="1=0,28, 10=0,183, 50=0,1154, 100=0,0923, 500=0,06668, 1000=0,05899, 2500=0,05642, 5000=0,05129 (USD)", RoHS=Yes, RoHS Compliant=Yes, Stock 1=92210, Supplier 1=Digi-Key, Thickness=500um, Voltage Rating (DC)=6.3V, Width=300um
C119 C134 C143 C150 C155: library part Cap_0402, Capacitance=2.2uF, Case/Package=0201, Case Code (Metric)=0603, Dielectric=X5R, Manufacturer=Murata, Manufacturer Part Number 1=GRM033R60J225ME47D, Max Operating Temperature=85°C, Min Operating Temperature=-55°C, Supplier Part Number 1=490-13225-1-ND, Tolerance=20%, Voltage Rating=6.3V, Case Code (Imperial)=0201, ComponentLink1Description=https://datasheet.octopart.com/GRM033R60J225ME47D-Murata-datasheet-96971104.pdf?src-supplier=Future+Electronics, ComponentLink1URL=https://datasheet.octopart.com/GRM033R60J225ME47D-Murata-datasheet-96971104.pdf?src-supplier=Future+Electronics, ComponentLink2Description=http://search.murata.co.jp/Ceramy/image/img/A01X/G101/ENG/GRM033R60J225ME47-01.pdf?src-supplier=Digi-Key, ComponentLink2URL=http://search.murata.co.jp/Ceramy/image/img/A01X/G101/ENG/GRM033R60J225ME47-01.pdf?src-supplier=Digi-Key, ComponentLink3Description=https://datasheet.octopart.com/GRM033R60J225ME47D-Murata-datasheet-165579666.pdf?src-supplier=TME, ComponentLink3URL=https://datasheet.octopart.com/GRM033R60J225ME47D-Murata-datasheet-165579666.pdf?src-supplier=TME, Height=390um, Length=0.024inch, Material=Ceramic, Mount="Surface Mount", Packaging="Cut Tape", Part Description="CAP CER 2.2UF 6.3V X5R 0201", Pricing 1="1=0,19, 10=0,121, 50=0,0764, 100=0,0612, 500=0,04418, 1000=0,03909, 2500=0,03739, 5000=0,03399 (USD)", RoHS=Yes, RoHS Compliant=Yes, Series=GRM, Stock 1=8554536, Supplier 1=Digi-Key, Thickness=0.015inch, Voltage Rating (DC)=6.3V, Width=0.012inch
C122: library part Cap_0402, Manufacturer=Murata, Manufacturer Part Number 1=GRM033R71C332KA88D, Supplier Part Number 1=490-3191-1-ND, ComponentLink1Description=https://datasheet.ciiva.com/18699/grm033r61c333ke84-01-18699265.pdf?src-supplier=Digi-Key, ComponentLink1URL=https://datasheet.ciiva.com/18699/grm033r61c333ke84-01-18699265.pdf?src-supplier=Digi-Key, ComponentLink2Description=https://datasheet.ciiva.com/24223/c02e-24223974.pdf?src-supplier=Mouser, ComponentLink2URL=https://datasheet.ciiva.com/24223/c02e-24223974.pdf?src-supplier=Mouser, ComponentLink3Description=https://datasheet.ciiva.com/18184/getdatasheetpartid-467171-18184093.pdf?src-supplier=Verical, ComponentLink3URL=https://datasheet.ciiva.com/18184/getdatasheetpartid-467171-18184093.pdf?src-supplier=Verical, ComponentLink4Description=https://datasheet.ciiva.com/129/grm033r71c332ka88-01-129900.pdf?src-supplier=Digikey, ComponentLink4URL=https://datasheet.ciiva.com/129/grm033r71c332ka88-01-129900.pdf?src-supplier=Digikey, ComponentLink5Description=https://datasheet.ciiva.com/25788/cl03a104mp3nnnc-25788272.pdf?src-supplier=Digi-Key, ComponentLink5URL=https://datasheet.ciiva.com/25788/cl03a104mp3nnnc-25788272.pdf?src-supplier=Digi-Key, ComponentLink6Description=https://datasheet.ciiva.com/129/grm033r71c332ka88-01-129901.pdf?src-supplier=Digikey, ComponentLink6URL=https://datasheet.ciiva.com/129/grm033r71c332ka88-01-129901.pdf?src-supplier=Digikey, ComponentLink7Description=https://datasheet.ciiva.com/129/grm033r71c332ka88-01-129902.pdf?src-supplier=Digikey, ComponentLink7URL=https://datasheet.ciiva.com/129/grm033r71c332ka88-01-129902.pdf?src-supplier=Digikey, ComponentLink8Description=https://datasheet.ciiva.com/11620/product-11620449.pdf?src-supplier=Avnet, ComponentLink8URL=https://datasheet.ciiva.com/11620/product-11620449.pdf?src-supplier=Avnet, Lead Free=5697LeadFree, Part Description="3300 pF ±10% 16V Ceramic Capacitor X7R 0201 (0603 Metric)", Pricing 1="1=0,1, 10=0,02, 50=0,0118, 100=0,0091, 500=0,00684, 1000=0,00538, 2500=0,00489, 5000=0,0045 (USD)", RoHS=Yes, Stock 1=176450, Supplier 1=Digikey
C125 C135 C147 C151 C156: library part Cap_0603, Manufacturer=Murata, Manufacturer Part Number 1=GRM155R61A106ME11D, Supplier Part Number 1=490-GRM155R61A106ME11DCT-ND, ComponentLink1Description=http://search.murata.co.jp/Ceramy/image/img/A01X/G101/ENG/GRM188R61C106MAAL-01.pdf?src-supplier=Digi-Key, ComponentLink1URL=http://search.murata.co.jp/Ceramy/image/img/A01X/G101/ENG/GRM188R61C106MAAL-01.pdf?src-supplier=Digi-Key, ComponentLink2Description=https://search.murata.co.jp/Ceramy/image/img/A01X/G101/ENG/GRM188R61C106MAAL-01.pdf?src-supplier=Digi-Key, ComponentLink2URL=https://search.murata.co.jp/Ceramy/image/img/A01X/G101/ENG/GRM188R61C106MAAL-01.pdf?src-supplier=Digi-Key, ComponentLink3Description=http://search.murata.co.jp/Ceramy/image/img/A01X/partnumbering_e_01.pdf?src-supplier=Digi-Key, ComponentLink3URL=http://search.murata.co.jp/Ceramy/image/img/A01X/partnumbering_e_01.pdf?src-supplier=Digi-Key, ComponentLink4Description=http://www.farnell.com/datasheets/1872210.pdf?src-supplier=Farnell, ComponentLink4URL=http://www.farnell.com/datasheets/1872210.pdf?src-supplier=Farnell, ComponentLink5Description=http://www.mouser.com/ds/2/281/c02e-2905.pdf?src-supplier=Mouser, ComponentLink5URL=http://www.mouser.com/ds/2/281/c02e-2905.pdf?src-supplier=Mouser, ComponentLink6Description=http://www.farnell.com/datasheets/1872210.pdf?src-supplier=Newark, ComponentLink6URL=http://www.farnell.com/datasheets/1872210.pdf?src-supplier=Newark, ComponentLink7Description=http://www.farnell.com/datasheets/2048014.pdf?src-supplier=Element14, ComponentLink7URL=http://www.farnell.com/datasheets/2048014.pdf?src-supplier=Element14, ComponentLink8Description=http://www.farnell.com/datasheets/1872210.pdf?src-supplier=Element14, ComponentLink8URL=http://www.farnell.com/datasheets/1872210.pdf?src-supplier=Element14, ComponentLink9Description=http://search.murata.co.jp/Ceramy/image/img/A01X/G101/ENG/GRM188R61A106ME69-01.pdf?src-supplier=Digi-Key, ComponentLink9URL=http://search.murata.co.jp/Ceramy/image/img/A01X/G101/ENG/GRM188R61A106ME69-01.pdf?src-supplier=Digi-Key, ComponentLink10Description=https://datasheet.octopart.com/GRM155R61A106ME11D-Murata-datasheet-155239053.pdf?src-supplier=Element14, ComponentLink10URL=https://datasheet.octopart.com/GRM155R61A106ME11D-Murata-datasheet-155239053.pdf?src-supplier=Element14, ComponentLink11Description=https://datasheet.octopart.com/GRM155R61A106ME11D-Murata-datasheet-165579666.pdf?src-supplier=TME, ComponentLink11URL=https://datasheet.octopart.com/GRM155R61A106ME11D-Murata-datasheet-165579666.pdf?src-supplier=TME, Part Description="10 µF ±20% 10V Ceramic Capacitor X5R 0402 (1005 Metric)", Pricing 1="1=0,13, 10=0,091, 50=0,054, 100=0,0425, 500=0,03142, 1000=0,02601, 2500=0,0242, 5000=0,02214 (USD)", RoHS=Yes, RoHS Compliant=Yes, Stock 1=185401, Supplier 1=Digi-Key